# Altium PCB Raptor_V1.1.PcbDoc
Units mil, origin at the board's own origin, x right, y up, seen from the top; angles counter-clockwise.
Board outline 2857 x 2362 mil, 2 copper layers (Top Layer, Bottom Layer); 77 components, 48 nets, 231 pads, 329 vias.
Unrouted connection lines stored in the file: 3.
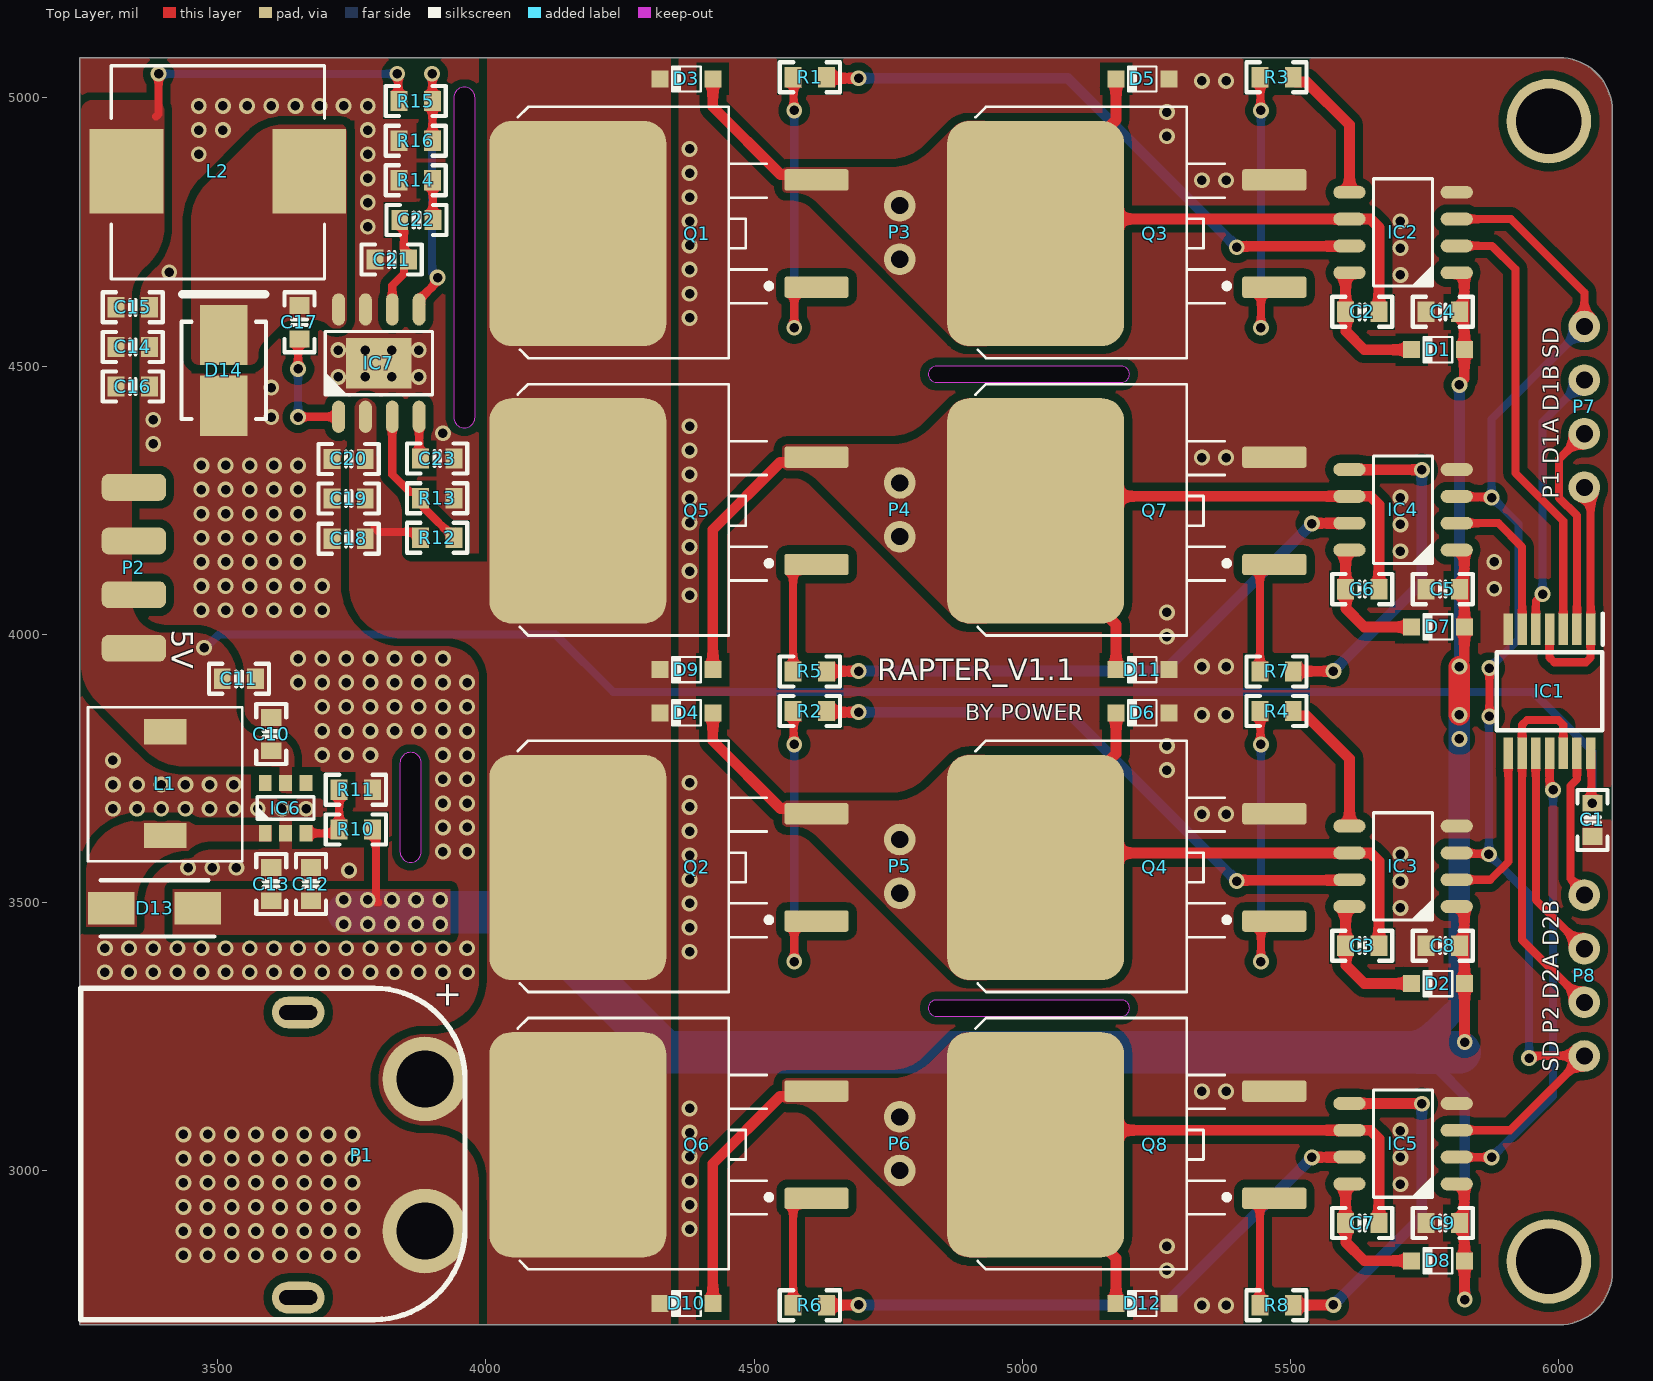
[diagram p0: Top Layer view]
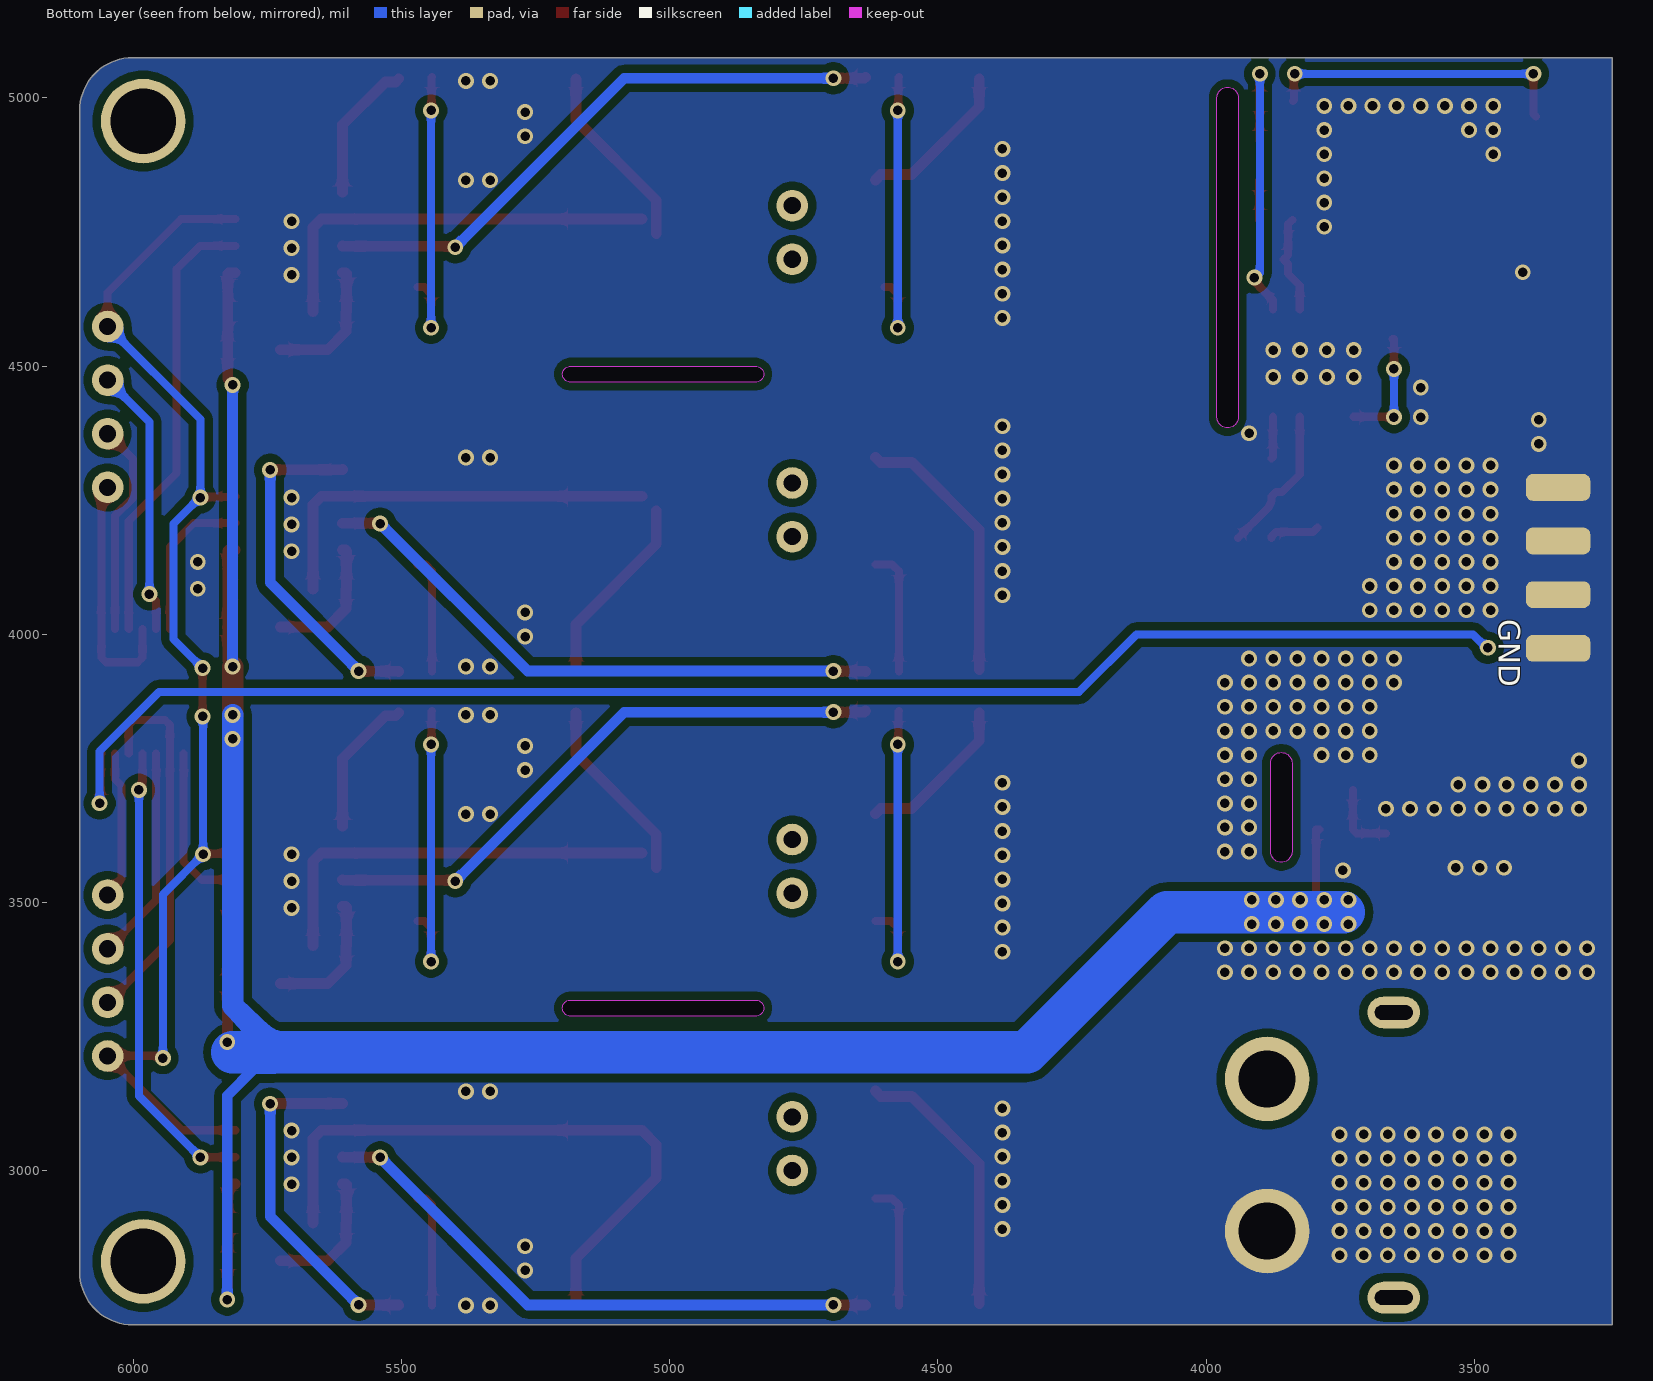
[diagram p1: Bottom Layer view, seen from below]
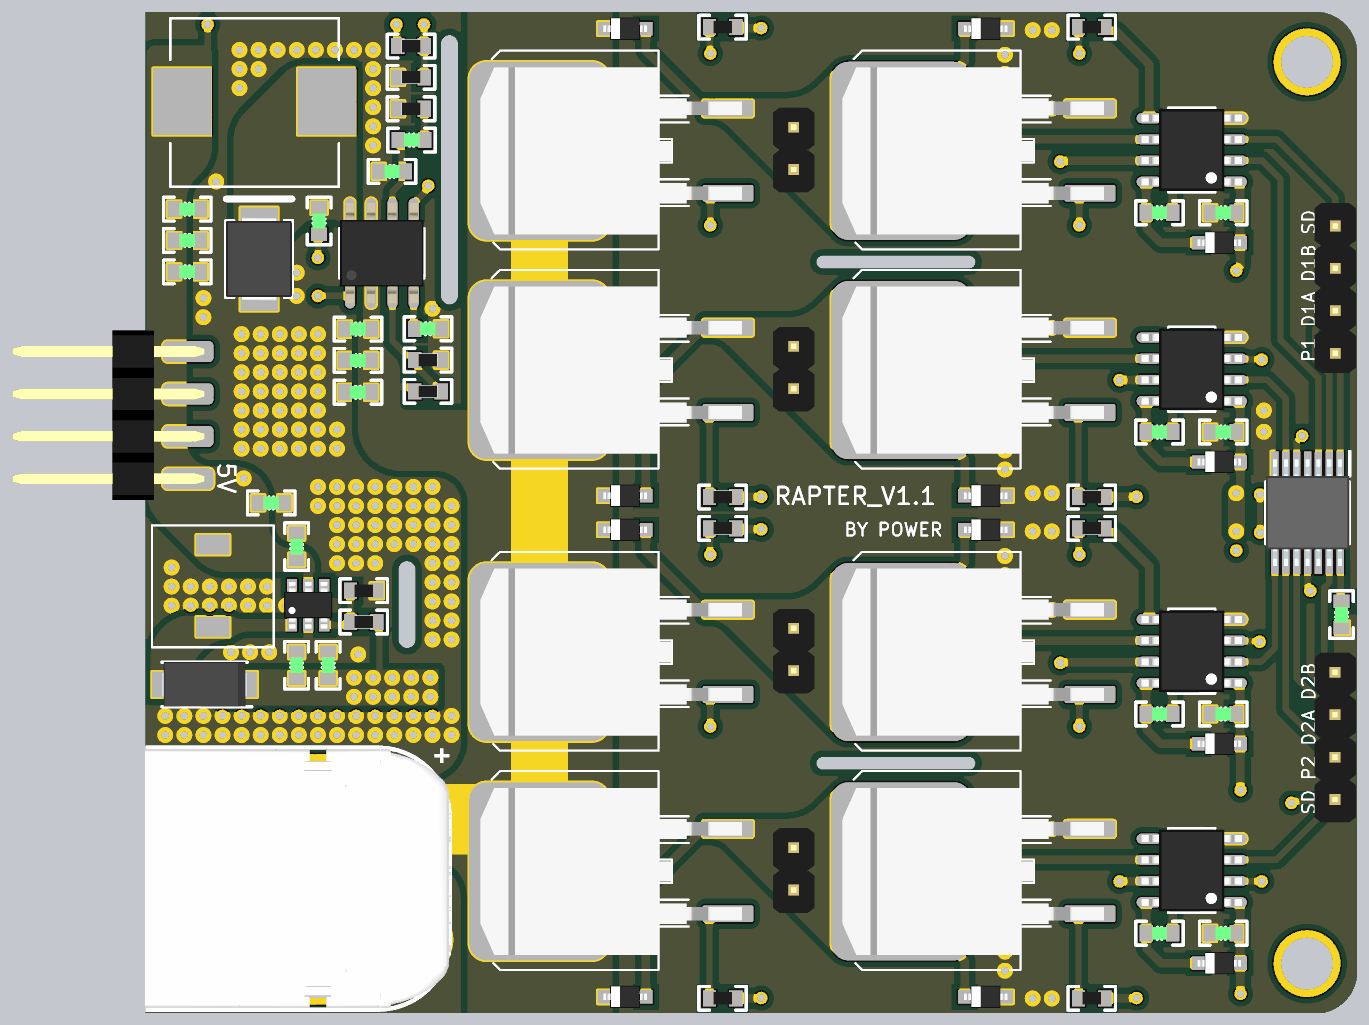
[diagram p2: 3D render of the assembled board from above, using the file's embedded part models]

## Layer stack, top to bottom
Top Solder: solder mask 0.4, Solder Resist, Dk 3.5
Top Layer: signal copper 1.4
Dielectric 1: dielectric 12.6, FR-4, Dk 4.8
Bottom Layer: signal copper 1.4
Bottom Solder: solder mask 0.4, Solder Resist, Dk 3.5

## Board outline
3243,2713 3243,5075 6001.57,5075 cw(c6001.57,4976.57) 6100,4976.57 6100,2811.43 cw(c6001.57,2811.43) 6001.57,2713
cut-out: 4840,3288.34 5185,3288.34 ccw(c5185,3303.34) 5200,3303.34 ccw(c5185,3303.34) 5185,3318.34 4840,3318.34 ccw(c4840,3303.34) 4825,3303.34 ccw(c4840,3303.34)
cut-out: 4840,4470 5185,4470 ccw(c5185,4485) 5200,4485 ccw(c5185,4485) 5185,4500 4840,4500 ccw(c4840,4485) 4825,4485 ccw(c4840,4485)
cut-out: 3840,3595 ccw(c3860,3595) 3860,3575 ccw(c3860,3595) 3880,3595 3880,3760 ccw(c3860,3760) 3860,3780 ccw(c3860,3760) 3840,3760
cut-out: 3940,4405 ccw(c3960,4405) 3960,4385 ccw(c3960,4405) 3980,4405 3980,5000 ccw(c3960,5000) 3960,5020 ccw(c3960,5000) 3940,5000

## Design rules (kind name [scope] priority, off if disabled: settings)
Clearance GND [InNamedPolygon('NONET_L01_P-001') Or InNamedPolygon('NONET_L01_P-001')] p1: gap=10 ignorepadtopadclearanceinfootprint=FALSE except(0: Arc-Hole Track-Hole SMDPad-Hole THPad-Hole Via-Hole Fill-Hole Poly-Hole Region-Hole Text-Hole; 15: Arc-Fill Arc-Poly Arc-Region Track-Fill Track-Poly Track-Region SMDPad-Fill SMDPad-Poly SMDPad-Region THPad-Fill THPad-Poly THPad-Region Via-Fill Via-Poly Via-Region Fill-Fill Fill-Poly Fill-Region Poly-Poly Poly-Region Region-Region)
Clearance 5V [InNamedPolygon('NONET_L01_P-001')] p2: gap=10 ignorepadtopadclearanceinfootprint=FALSE except(0: Arc-Hole Track-Hole SMDPad-Hole THPad-Hole Via-Hole Fill-Hole Poly-Hole Region-Hole Text-Hole)
Clearance Clearance_1 [InNamedPolygon('NONET_L01_P-001')] p3: gap=10 ignorepadtopadclearanceinfootprint=FALSE except(0: Arc-Hole Track-Hole SMDPad-Hole THPad-Hole Via-Hole Fill-Hole Poly-Hole Region-Hole Text-Hole; 15: Arc-Fill Arc-Poly Arc-Region Track-Fill Track-Poly Track-Region SMDPad-Fill SMDPad-Poly SMDPad-Region THPad-Fill THPad-Poly THPad-Region Via-Fill Via-Poly Via-Region Fill-Fill Fill-Poly Fill-Region Poly-Poly Poly-Region Region-Region)
Clearance [All] p4: gap=10 ignorepadtopadclearanceinfootprint=FALSE except(0: Arc-Hole Track-Hole SMDPad-Hole THPad-Hole Via-Hole Fill-Hole Poly-Hole Region-Hole Text-Hole; 15: Arc-Fill Arc-Poly Arc-Region Track-Fill Track-Poly Track-Region SMDPad-Fill SMDPad-Poly SMDPad-Region THPad-Fill THPad-Poly THPad-Region Via-Fill Via-Poly Via-Region Fill-Fill Fill-Poly Fill-Region Poly-Poly Poly-Region Region-Region)
PlaneConnect [All] p1: planeconnectstyle=Direct reliefexpansion=20 reliefentries=4 reliefconductorwidth=10 reliefairgap=10
PolygonConnect [All] p1: connectstyle=Direct reliefconductorwidth=10 reliefentries=4 polygonreliefangle="90 Angle" airgapwidth=10
RoutingVias [All] p1: holewidth=17.72 width=29.53 viastyle="Through Hole" minholewidth=17.72 minwidth=29.53 maxholewidth=17.72 maxwidth=29.53
SolderMaskExpansion [All] p1: expansion=4 istentingtop=FALSE
Width [All] p1: maxlimit=10000 minlimit=10 preferedwidth=15
29 further rules are at their usual default settings.

## Classes and differential pairs
component class H-bridge: C1 C2 C3 C4 C5 C6 C7 C8 C9 D1 D2 D3 D4 D5 D6 D7 D8 D9 D10 D11 D12 IC1 IC2 IC3 IC4 IC5 P1 P2 P3 P4 P5 P6 P7 P8 Q1 Q2 Q3 Q4 Q5 Q6 Q7 Q8 R1 R2 R3 R4 R5 R6 R7 R8
component class Buck-to-5V: C14 C15 C16 C17 C18 C19 C20 C21 C22 C23 D14 IC7 L2 R12 R13 R14 R15 R16
component class Boost-to-12V: C10 C11 C12 C13 D13 IC6 L1 R10 R11

## Components (designator, comment, footprint, x,y, rotation, side; value= is the part's Value field where it differs from the comment)
C1 "100nF" CAP-0603 6063,3654 r90 top
C2 "1uF/25V" CAP-0603 5633.95,4601.26 r0 top
C3 "1uF/25V" CAP-0603 5633.95,3419.6 r0 top
C4 "100nF" CAP-0603 5784.07,4601.26 r0 top
C5 "100nF" CAP-0603 5784.07,4084.32 r0 top
C6 "1uF/25V" CAP-0603 5633.95,4084.32 r0 top
C7 "1uF/25V" CAP-0603 5633.95,2902.65 r0 top
C8 "100nF" CAP-0603 5784.07,3419.6 r0 top
C9 "100nF" CAP-0603 5784.07,2902.65 r0 top
C10 "10uF/25V" CAP-0603 3599.89,3814.16 r270 top
C11 "10uF/25V" CAP-0603 3539.9,3917.15 r180 top
C12 "10uF/25V" CAP-0603 3674,3534.51 r270 top
C13 "10uF/25V" CAP-0603 3599.89,3534.51 r270 top
C14 "47uF" CAP-0603 3342,4535.87 r180 top
C15 "47uF" CAP-0603 3342,4609.75 r180 top
C16 "100nF" CAP-0603 3342,4461.98 r180 top
C17 "100nF" CAP-0603 3652.71,4581.75 r90 top
C18 "4.7uF" CAP-0603 3744.27,4178.12 r0 top
C19 "4.7uF" CAP-0603 3744.27,4253.12 r0 top
C20 "100nF" CAP-0603 3744.27,4327 r0 top
C21 "22pF" CAP-0603 3824.55,4698.64 r0 top
C22 "2200pF" CAP-0603 3870.66,4772.52 r180 top
C23 "10nF" CAP-0603 3909.27,4327.74 r180 top
D1 "SS14" SOD_323 5775.05,4530.75 r0 top
D2 "SS14" SOD_323 5775.05,3349.09 r0 top
D3 "SS14" SOD_323 4374.1,5035.35 r0 top locked
D4 "SS14" SOD_323 4374.1,3853.68 r0 top locked
D5 "SS14" SOD_323 5224.1,5035.35 r0 top locked
D6 "SS14" SOD_323 5224.1,3853.68 r0 top locked
D7 "SS14" SOD_323 5775.05,4013.81 r0 top
D8 "SS14" SOD_323 5775.05,2832.14 r0 top
D9 "SS14" SOD_323 4374.1,3934.32 r0 top locked
D10 "SS14" SOD_323 4374.1,2752.65 r0 top locked
D11 "SS14" SOD_323 5224.1,3934.32 r0 top locked
D12 "SS14" SOD_323 5224.1,2752.65 r0 top locked
D13 "SS34" DO-214AC/SMA 3382.71,3489.21 r180 top
D14 "SS54" DO-214AA/SMB 3511.35,4492.08 r270 top
IC1 "SN74HC08PW" TSSOP14 5983,3894 r270 top
IC2 "IR2104S" SOIC_8 5709.99,4749.21 r90 top
IC3 "IR2104S" SOIC_8 5709.99,3567.54 r90 top
IC4 "IR2104S" SOIC_8 5709.99,4232.26 r90 top
IC5 "IR2104S" SOIC_8 5709.99,3050.6 r90 top
IC6 "SX1308" SOT-23-6 3626.95,3676.21 r270 top
IC7 "TPS54531DDA" SOIC_8_PAD 3800.66,4505.69 r0 top
L1 "4.7uH/4A" SMD_7.3x7.3x4.2mm 3387.67,3739.18 r270 top
L2 "4.7uH 5A" L-10040 3500.66,4863.31 r180 top
P1 "XT30" XT60PW-M 3886.47,2887.7 r90 top locked
P2 "HDR2x4_2.54" HDR2X4_2.54_180H 3344,3974 r180 top
P3 "HDR1x2_2.54" HDR1X2_2.54_180 4771.57,4799.21 r0 top
P4 "HDR1x2_2.54" HDR1X2_2.54_180 4771.57,4282.26 r0 top
P5 "HDR1x2_2.54" HDR1X2_2.54_180 4771.57,3617.55 r0 top
P6 "HDR1x2_2.54" HDR1X2_2.54_180 4771.57,3100.6 r0 top
P7 "HDR1x4_2.54" HDR1x4_2.54_180 6048,4274 r180 top
P8 "HDR1x4_2.54" HDR1x4_2.54_180 6048,3514 r0 top
Q1 "IRF3205S" D2PAK-3 4394.1,4747.24 r0 top
Q2 "IRF3205S" D2PAK-3 4394.1,3565.58 r0 top
Q3 "IRF3205S" D2PAK-3 5247.54,4747.24 r0 top locked
Q4 "IRF3205S" D2PAK-3 5247.54,3565.58 r0 top locked
Q5 "IRF3205S" D2PAK-3 4394.1,4230.29 r0 top
Q6 "IRF3205S" D2PAK-3 4394.1,3048.63 r0 top
Q7 "IRF3205S" D2PAK-3 5247.54,4230.29 r0 top locked
Q8 "IRF3205S" D2PAK-3 5247.54,3048.63 r0 top locked
R1 "51R" R-0603 4604.1,5038.72 r180 top locked
R2 "51R" R-0603 4604.1,3857.06 r180 top locked
R3 "51R" R-0603 5474.1,5038.72 r180 top locked
R4 "51R" R-0603 5474.1,3857.06 r180 top locked
R5 "51R" R-0603 4604.1,3930.94 r180 top locked
R6 "51R" R-0603 4604.1,2749.28 r180 top locked
R7 "51R" R-0603 5474.1,3930.94 r180 top locked
R8 "51R" R-0603 5474.1,2749.28 r180 top locked
R10 "191k" R-0603 3757.77,3636.39 r0 top
R11 "10k" R-0603 3757.77,3710.27 r180 top
R12 "665k" R-0603 3909.27,4179.97 r180 top
R13 "130k" R-0603 3909.27,4253.86 r180 top
R14 "37.4k" R-0603 3869.55,4846.4 r0 top
R15 "10.2k" R-0603 3869.55,4994.17 r180 top
R16 "1.96k" R-0603 3869.55,4920.29 r0 top

## Footprints (in the part's own frame and the unit in brackets; to place one, negate y for a bottom-side part, rotate by r counter-clockwise, add the part's x,y. Pads: shape width x height; smd on the part's side, far side on the other; paste and mask are expansions set on the pad)
CAP-0603 [mm]
  rect 0.8x0.96 smd: 1(-0.79,0) 2(0.79,0)
  silkscreen extent -1.42,-0.71 1.42,0.71, body extent -0.76,-0.39 0.76,0.39, height 0.9
D2PAK-3 [mil] "D-PAK/TO-263-3; 3 Leads (1 Cropped); Body 14.7 (inc. leads) x 10.2 mm (LxW max)"
  round 20 on Mech15: 0(0,0)
  rrect25% 120x40 smd: 1(222.5,-100) 2(222.5,100)
  rrect25% 330x420 smd: 3(-222.5,0)
  silkscreen extent -335,-232 139,236, body extent -361,-197 256,197, height 189
DO-214AA/SMB [mm]
  rect 2.85x2.25 smd: 1(1.675,0) 2(-1.675,0)
  silkscreen extent -3.6,-2 2.3,2, body extent -2.5,-1.97 2.5,1.97, height 2.44
DO-214AC/SMA [mm]
  rect 2.2x1.55 smd: 1(2.05,0) 2(-2.05,0)
  silkscreen extent -2.83,-1.33 2.55,1.33, body extent -2.55,-1.33 2.55,1.33, height 2.29
HDR1X2_2.54_180 [mm]
  round 1.5 hole 0.813: 1(0,0) 2(0,-2.54)
  body extent -1.25,-3.81 1.25,1.27, height 8.2
HDR1x4_2.54_180 [mm]
  round 1.5 hole 0.813: 1(0,0) 2(0,-2.54) 3(0,-5.08) 4(0,-7.62)
  body extent -1.25,-8.89 1.25,1.27, height 8.2
HDR2X4_2.54_180H [mil]
  rrect50% 120x50 smd: 1(0,0) 3(0,-100) 5(0,-200) 7(0,-300)
  rrect50% 120x50 smd far side: 2(0,0) 4(0,-100) 6(0,-200) 8(0,-300)
  body extent -38,-350 415,50, height 78
L-10040 [mm] "10.1*11.6*4.0MM(长*宽*高)"
  rect 3.5x4 smd: 1(-4.326,0) 2(4.326,0)
  silkscreen extent -5.05,-5 5.05,5.1, body extent -5,-5 5,5.08, height 4
R-0603 [mm]
  rect 0.8x0.96 smd: 1(-0.79,0) 2(0.79,0)
  silkscreen extent -1.42,-0.71 1.42,0.71, body extent -0.76,-0.38 0.76,0.38, height 0.41
SMD_7.3x7.3x4.2mm [mm]
  rect 1.2x2 smd: 1(-2.02,0.37) 2(2.9,0.37)
  silkscreen extent -3.18,-3.28 4.12,4.02, body extent -3.18,-3.28 4.1,4, height 3
SOD_323 [mm]
  rect 0.8x0.8 smd: 1(1.25,0) 2(-1.25,0)
  silkscreen extent -0.72,-0.6 0.67,0.6, body extent -1.3,-0.68 1.3,0.68, height 1.1
SOIC_8 [mil]
  oval 24x60 smd: 1(-75,-100.02) 2(-25,-100.02) 3(25,-100.02) 4(75,-100.02) 5(75,99.98) 6(25,99.98) 7(-25,99.98) 8(-75,99.98)
  silkscreen extent -100,-55 100,55, body extent -96,-118 96,118, height 69
SOIC_8_PAD [mil]
  oval 24x60 smd: 1(-75,-100) 2(-25,-100) 3(25,-100) 4(75,-100) 5(75,100) 6(25,100) 7(-25,100) 8(-75,100)
  rect 122.05x94.49 smd: 9(0,0)
  silkscreen extent -100,-59 100,59, body extent -98,-118 98,118, height 71
SOT-23-6 [mil]
  rect 30x24 smd: 1(47,-38) 2(47,0) 3(47,38) 4(-47,38) 5(-47,0) 6(-47,-38)
  silkscreen extent -21,-53 21,53, body extent -55,-57 55,57, height 57
TSSOP14 [mm]
  rect 1.475x0.45 smd: 1(-2.938,1.95) 2(-2.938,1.3) 3(-2.938,0.65) 4(-2.938,0) 5(-2.938,-0.65) 6(-2.938,-1.3) 7(-2.938,-1.95) 8(2.938,-1.95) 9(2.938,-1.3) 10(2.938,-0.65) 11(2.938,0) 12(2.938,0.65) 13(2.938,1.3) 14(2.938,1.95)
  silkscreen extent -3.67,-2.5 1.85,2.52, body extent -3.2,-2.5 3.2,2.5, height 1.2
XT60PW-M [mm]
  oval 1.5x2.5 hole 0.7 slot 1.8 at 90 deg: 0(-3.15,6) 0(10.35,6)
  round 4 hole 2.7: 1(7.2,0) 2(0,0)
  silkscreen extent -4.2,-1.9 11.5,16.3, body extent -4.3,-1.95 11.6,16.35, height 8.45

## Part data
C1 C2 C3 C4 C5 C6 C7 C8 C9 C14 C15 C16 C17 C18 C19 C20 C21 C22 C23: library part CAP, "贴片电容", Package=0402, SuppliersPartNumber=C52923, ComponentLink1Description=供应商链接, ComponentLink1URL=http://www.szlcsc.com/product/details_53938.html, Supplier=LC
C10 C11 C12 C13: library part CAP, "X7R", Package=0402, SuppliersPartNumber=C52923, ComponentLink1Description=供应商链接, ComponentLink1URL=http://www.szlcsc.com/product/details_53938.html, Supplier=LC
D1 D2 D3 D4 D5 D6 D7 D8 D9 D10 D11 D12 D13: library part DIODE, "二极管", Package=SMA(DO-214AC), SuppliersPartNumber=C22452, ComponentLink1Description=供应商链接, ComponentLink1URL=http://www.szlcsc.com/product/details_23178.html, Supplier=LC
D14: library part DIODE, "肖特基二极管", Package=SMA(DO-214AC), SuppliersPartNumber=C22452, ComponentLink1Description=供应商链接, ComponentLink1URL=http://www.szlcsc.com/product/details_23178.html, Supplier=LC
IC1: "Integrated Circuit", Arrow Part Number=SN74HCT08PW, Manufacturer_Name="Texas Instruments", Mouser Part Number=595-SN74HCT08PW, Arrow Price/Stock=https://www.arrow.com/en/products/sn74hct08pw/texas-instruments, Datasheet Link=http://www.ti.com/lit/gpn/SN74HCT08, Height=1.2mm, Manufacturer_Part_Number=SN74HCT08PW, Mouser Price/Stock=https://www.mouser.co.uk/ProductDetail/Texas-Instruments/SN74HCT08PW?qs=7KMwW2o1%252BmRuz7pKtn1cmg%3D%3D
IC2 IC3 IC4 IC5: "Integrated Circuit", Manufacturer_Name=Infineon, Datasheet Link=http://www.infineon.com/dgdl/ir2104.pdf?fileId=5546d462533600a4015355c7c1c31671, Height=1.75mm, Manufacturer_Part_Number=IR2104S
IC6: "集成升压芯片", Manufacturer_Name="Shenzhen Suosemi Tech", Datasheet Link=https://datasheet.lcsc.com/szlcsc/Shenzhen-Suosemi-Tech-SX1308_C78162.pdf, Height=1.45mm, Manufacturer_Part_Number=SX1308
IC7: "集成稳压芯片", Manufacturer_Name="Texas Instruments", Mouser Part Number=595-TPS54531DDA, Arrow Part Number=TPS54531DDA, Arrow Price/Stock=https://www.arrow.com/en/products/tps54531dda/texas-instruments, Datasheet Link=http://www.ti.com/lit/gpn/tps54531, Height=1.7mm, Manufacturer_Part_Number=TPS54531DDA, Mouser Price/Stock=https://www.mouser.co.uk/ProductDetail/Texas-Instruments/TPS54531DDA?qs=jA5Ki6243omoJVKISZs%2FBg%3D%3D
L1 L2: library part INDUCTOR, "电感", Package=0402, SuppliersPartNumber=C32041, ComponentLink1Description=供应商链接, ComponentLink1URL=http://www.szlcsc.com/product/details_33003.html, Supplier=LC
P1: library part XT30/60, "XT30/60"
P2 P3 P4 P5 P6 P7 P8: "Header"
Q1 Q2 Q3 Q4 Q5 Q6 Q7 Q8: library part N-MOS, "N 沟道 MOS", Manufacturer_Name=Nexperia, Manufacturer_Part_Number=SI2302DS, Mouser Part Number=N/A, RS Part Number=7983053P, Datasheet Link=https://assets.nexperia.com/documents/data-sheet/SI2302DS.pdf, Height=1.1mm, Mouser Price/Stock=https://www.mouser.com/Search/Refine.aspx?Keyword=N%2FA, RS Price/Stock=http://uk.rs-online.com/web/p/products/7983053P
R1 R2 R3 R4 R5 R6 R7 R8 R10 R11 R12 R13 R14 R15 R16: library part RES, "贴片电阻", Package=0805, SuppliersPartNumber=C17798, Supplier=LC

## Free pads (board coordinates)
  round 157.48 hole 122.05: 3(5981.89,2831.11) 3(5981.89,4956.89)

## Via types
v1: diameter 29.53, hole 17.72, Top Layer to Bottom Layer, 329 vias

## Nets (pads, with @x,y where several pads share a name; then routed paths per layer and width w, separated by ;. In a path a pad name is that pad's centre, name@x,y a point inside that pad or via, vN(x,y) a via of type N, cw(c..) or ccw(c..) an arc to the next point about the centre after c; other vN are vias at no path point)
5V: C1.2 C10.2 C11.2 C14.2 C15.2 C16.2 IC1.14 IC6.5 L1.1 L2.2 P2.1 P2.3 P2.5 P2.7 R15.2 | length 3459.4
  Top Layer w15: 3385,4965 3390,4970 v1(3390,5045) ; v1(3835,5045) 3836.73,5043.27 3836.73,4995.9 R15.2 ; IC1.14 6061.13,3776.97 6061.13,3686.97 v1(6063,3685.1)
  Bottom Layer w15: v1(3390,5045) v1(3835,5045) ; v1(3475,3975) 3477.7,3975 3502.7,4000 4130,4000 4237.5,3892.5 5952.5,3892.5 6063,3782 v1(6063,3685.1)
12V: C4.2 C5.2 C8.2 C9.2 C12.2 C13.2 D1.1 D2.1 D7.1 D8.1 D13.2 IC2.1 IC3.1 IC4.1 IC5.1 R10.2 | length 5235.8
  Top Layer w15: R10.2 3795,3636.39 3795,3500 3800,3500
  Top Layer w20: IC5.1 5822.41,2975.6 5824.26,2973.75 D8.1@5824.26,2826.76 ; IC3.1 5822.41,3492.55 5824.26,3490.7 D2.1 5824.63,3348.72 5824.63,3240.37 v1(5825,3240) ; IC4.1 5822.41,4157.26 5824.26,4155.42 D7.1 ; IC2.1 5822.41,4674.21 5824.26,4672.36 5824.26,4476.84 5815,4467.58 v1(5815,4465) ; v1(5815,3940) 5815,3942.58 5824.26,3951.84 D7.1 ; D7.1@5824.63,4013.44 D7.1 ; v1(5825,2760) 5824.63,2760.37 5824.63,2831.04 D8.1@5825,2831.41
  Top Layer w40: v1(5815,3850) v1(5815,3940)
  Bottom Layer w20: 5706.06,3221 5717.06,3210 ; v1(5815,3940) v1(5815,4465) ; v1(5825,2760) 5825,3140 5775,3190 5737.06,3190 5717.06,3210 ; v1(5825,3240) 5822.42,3240 5803.42,3221 5792.42,3210 5717.06,3210
  Bottom Layer w40: 5717.06,3210 5728.06,3221 5815,3307.94 v1(5815,3805) v1(5815,3850)
  Bottom Layer w80: 3744,3482 4073.44,3482 4334.44,3221 5706.06,3221 5728.06,3221 5803.42,3221 5815,3221
  other v1: 3735,3460 3780,3460 3825,3460 3870,3460 3915,3460 3735,3505 3780,3505 3825,3505 3870,3505 3915,3505
DIR1A: IC1.2 P7.2 | length 397.6
  Top Layer w15: IC1.2 6034.18,4221.31 6000.97,4254.52 6000.97,4326.97 P7.2
DIR1B: IC1.5 P7.3 | length 501.9
  Top Layer w15: IC1.5 5957.41,4062.41 v1(5970,4075)
  Bottom Layer w15: v1(5970,4075) 5970,4396 P7.3
DIR2A: IC1.10 P8.2 | length 401.9
  Top Layer w15: IC1.10 5957.41,3504.59 P8.2
DIR2B: IC1.13 P8.1 | length 280.2
  Top Layer w15: IC1.13 6034.18,3730 6021.94,3717.76 6021.94,3544.81 6048,3518.75 P8.1
GND: C1.1 C4.1 C5.1 C8.1 C9.1 C10.1 C11.1 C12.1 C13.1 C14.1 C15.1 C16.1 C18.1 C19.1 C20.1 C21.1 C23.1 D5.1 D6.1 D11.1 D12.1 D14.1 IC1.7 IC2.4 IC3.4 IC4.4 IC5.4 IC6.2 IC7.7 IC7.9 P1.2 P2.2 P2.4 P2.6 P2.8 Q3.2 Q4.2 Q7.2 Q8.2 R11.1 R13.1 R14.1 R16.1
  other v1: 5335,2748.97 5380,2748.97 5269.63,2814.34 3436.47,2842.7 3481.47,2842.7 3526.47,2842.7 3571.47,2842.7 3616.47,2842.7 3661.47,2842.7 3706.47,2842.7 3751.47,2842.7 5269.63,2859.34 3436.47,2887.7 3481.47,2887.7 3526.47,2887.7 3571.47,2887.7 3616.47,2887.7 3661.47,2887.7 3706.47,2887.7 3751.47,2887.7 4380,2891.39 3436.47,2932.7 3481.47,2932.7 3526.47,2932.7 3571.47,2932.7 3616.47,2932.7 3661.47,2932.7 3706.47,2932.7 3751.47,2932.7 4380,2936.39 5705,2975 3436.47,2977.7 3481.47,2977.7 3526.47,2977.7 3571.47,2977.7 3616.47,2977.7 3661.47,2977.7 3706.47,2977.7 3751.47,2977.7 4380,2981.39 3436.47,3022.7 3481.47,3022.7 3526.47,3022.7 3571.47,3022.7 3616.47,3022.7 3661.47,3022.7 3706.47,3022.7 3751.47,3022.7 5705,3025 4380,3026.39 3436.47,3067.7 3481.47,3067.7 3526.47,3067.7 3571.47,3067.7 3616.47,3067.7 3661.47,3067.7 3706.47,3067.7 3751.47,3067.7 4380,3071.39 5705,3075 4380,3116.39 5335,3148.05 5380,3148.05 3290,3370 3335,3370 3380,3370 3425,3370 3470,3370 3515,3370 3560,3370 3605,3370 3650,3370 3695,3370 3740,3370 3785,3370 3830,3370 3875,3370 3920,3370 3965,3370 4380,3408.34 3290,3415 3335,3415 3380,3415 3425,3415 3470,3415 3515,3415 3560,3415 3605,3415 3650,3415 3695,3415 3740,3415 3785,3415 3830,3415 3875,3415 3920,3415 3965,3415 4380,3453.34 5705,3490 4380,3498.34 5705,3540 4380,3543.34 3745,3560 3445,3565 3490,3565 3535,3565 4380,3588.34 5705,3590 3920,3595 3965,3595 4380,3633.34 3920,3640 3965,3640 5335,3665 5380,3665 3305,3675 3350,3675 3395,3675 3440,3675 3485,3675 3530,3675 3575,3675 3620,3675 3665,3675 4380,3678.34 3920,3685 3965,3685 3305,3720 3350,3720 3395,3720 3440,3720 3485,3720 3530,3720 4380,3723.34 3920,3730 3965,3730 5269.63,3747 3305,3765 3695,3775 3740,3775 3785,3775 3920,3775 3965,3775 5269.63,3792 3695,3820 3740,3820 3785,3820 3830,3820 3875,3820 3920,3820 3965,3820 5335,3850 5380,3850 3695,3865 3740,3865 3785,3865 3830,3865 3875,3865 3920,3865 3965,3865 3650,3910 3695,3910 3740,3910 3785,3910 3830,3910 3875,3910 3920,3910 3965,3910 5335,3940 5380,3940 3650,3955 3695,3955 3740,3955 3785,3955 3830,3955 3875,3955 3920,3955 5269.63,3996 5269.63,4041 3470,4045 3515,4045 3560,4045 3605,4045 3650,4045 3695,4045 4380,4073.05 5880,4085 3470,4090 3515,4090 3560,4090 3605,4090 3650,4090 3695,4090 4380,4118.05 3470,4135 3515,4135 3560,4135 3605,4135 3650,4135 5880,4135 5705,4155 4380,4163.05 3470,4180 3515,4180 3560,4180 3605,4180 3650,4180 5705,4205 4380,4208.05 3470,4225 3515,4225 3560,4225 3605,4225 3650,4225 4380,4253.05 5705,4255 3470,4270 3515,4270 3560,4270 3605,4270 3650,4270 4380,4298.05 3470,4315 3515,4315 3560,4315 3605,4315 3650,4315 5335,4329.72 5380,4329.72 4380,4343.05 3380,4355 3920,4375 4380,4388.05 3380,4400 3600,4405 3600,4460 3725,4480 3775,4480 3825,4480 3875,4480 3725,4530 3775,4530 3825,4530 3875,4530 4380,4590 4380,4635 5705,4670 3410,4675 4380,4680 5705,4720 4380,4725 3780,4760 4380,4770 5705,4770 3780,4805 4380,4815 5335,4846.66 5380,4846.66 3780,4850 4380,4860 3465,4895 3780,4895 4380,4905 5269.63,4928.66 3465,4940 3510,4940 3780,4940 5269.63,4973.66 3465,4985 3510,4985 3555,4985 3600,4985 3645,4985 3690,4985 3735,4985 3780,4985 5335,5031.66 5380,5031.66
M1A: C2.2 D3.1 D5.2 IC2.6 P3.1 P3.2 Q1.2 Q3.3 | length 1428.7
  Top Layer w20: D3.1 4423.31,4983.35 4549.42,4857.24 4606.6,4857.24 Q1.2 ; Q3.3 5025.04,4809.15 5174.89,4959 D5.2 ; Q3.3@5052.01,4774.21 IC2.6 5649.4,4774.21 5665.05,4758.56 C2.2
M1B: C6.2 D9.1 D11.2 IC4.6 P4.1 P4.2 Q5.2 Q7.3 | length 1644.9
  Top Layer w20: D9.1 4423.31,4194.98 4548.63,4320.29 4606.6,4320.29 Q5.2 ; Q7.3 5025.04,4168.38 5174.89,4018.53 D11.2 ; Q7.3@5052.01,4257.26 IC4.6 5649.4,4257.26 5665.05,4241.61 C6.2
M2A: C3.2 D4.1 D6.2 IC3.6 P5.1 P5.2 Q2.2 Q4.3 | length 1428.7
  Top Layer w20: D4.1 4423.31,3801.69 4549.42,3675.58 4606.6,3675.58 Q2.2 ; Q4.3 5025.04,3627.49 5174.89,3777.34 D6.2 ; Q4.3@5052.01,3592.55 IC3.6 5649.4,3592.55 5665.05,3576.9 C3.2
M2B: C7.2 D10.1 D12.2 IC5.6 P6.1 P6.2 Q6.2 Q8.3 | length 1683
  Top Layer w20: D10.1 4423.31,3013.31 4548.63,3138.63 4606.6,3138.63 Q6.2 ; D12.2 5174.89,2836.87 5025.04,2986.72 Q8.3 5052.01,3075.6 IC5.6 5649.4,3075.6 5665.05,3059.95 C7.2
NetC2_1: C2.1 D1.2 IC2.8 | length 252
  Top Layer w20: IC2.8 5604.69,4674.21 5602.84,4672.36 C2.1 5603.63,4600.48 5603.63,4564.98 5637.86,4530.75 D1.2
NetC3_1: C3.1 D2.2 IC3.8 | length 252
  Top Layer w20: IC3.8 5604.69,3492.55 5602.84,3490.7 C3.1 5603.63,3418.81 5603.63,3383.32 5637.86,3349.09 D2.2
NetC6_1: C6.1 D7.2 IC4.8 | length 252
  Top Layer w20: IC4.8 5604.69,4157.26 5602.84,4155.42 C6.1 5603.63,4083.53 5603.63,4048.03 5637.86,4013.81 D7.2
NetC7_1: C7.1 D8.2 IC5.8 | length 252
  Top Layer w20: IC5.8 5604.69,2975.6 5602.84,2973.75 C7.1 5603.63,2901.87 5603.63,2866.37 5637.86,2832.14 D8.2
NetC17_1: C17.1 IC7.1 | length 224.7
  Top Layer w15: v1(3650,4405) 3650,4405.69 IC7.1 ; v1(3650,4495) 3650,4550.65 C17.1
  Bottom Layer w15: v1(3650,4405) v1(3650,4495)
NetC17_2: C17.2 D14.2 IC7.8 L2.1
NetC21_2: C21.2 C22.2 IC7.6 | length 185.9
  Top Layer w15: IC7.6 3825.66,4650.66 3847.41,4672.41 3847.41,4690.39 C21.2 3847.41,4706.88 3847.41,4764.66 C22.2
NetC22_1: C22.1 R14.2 | length 74.3
  Top Layer w15: R14.2 3901.21,4845.85 3901.21,4773.07 C22.1
NetC23_2: C23.2 IC7.4 | length 79
  Top Layer w15: IC7.4 3875.66,4330.25 C23.2
NetD13_1: D13.1 IC6.1 L1.2
NetIC2_5: IC2.5 R3.1 | length 266
  Top Layer w20: R3.1@5505.2,5035.57 5510.95,5029.82 5530.18,5029.82 5610.01,4949.99 IC2.5
NetIC2_7: IC2.7 R1.1 | length 1107.2
  Top Layer w20: R1.1 4637.26,5036.66 v1(4695,5036.66) ; v1(5400,4721.66) 5401.78,4723.44 5609.24,4723.44 IC2.7
  Bottom Layer w20: v1(4695,5036.66) 5085,5036.66 v1(5400,4721.66)
NetIC3_5: IC3.5 R4.1 | length 266
  Top Layer w20: R4.1@5505.2,3853.91 5510.95,3848.16 5530.18,3848.16 5610.01,3768.33 IC3.5
NetIC3_7: IC3.7 R2.1 | length 1107.2
  Top Layer w20: R2.1 4637.26,3855 v1(4695,3855) ; v1(5400,3540) 5401.78,3541.78 5609.24,3541.78 IC3.7
  Bottom Layer w20: v1(4695,3855) 5085,3855 v1(5400,3540)
NetIC4_5: IC4.5 R7.1 | length 653.7
  Top Layer w20: R7.1 5505.56,3931.3 5579.64,3931.3 v1(5580,3931.66) ; IC4.5 5610.31,4306.96 5744.7,4306.96 v1(5745,4306.66)
  Bottom Layer w20: v1(5580,3931.66) 5745,4096.66 v1(5745,4306.66)
NetIC4_7: IC4.7 R5.1 | length 1089.3
  Top Layer w20: R5.1 4635.56,3931.3 4694.64,3931.3 v1(4695,3931.66) ; v1(5540,4206.66) 5540.3,4206.96 5609.71,4206.96 IC4.7
  Bottom Layer w20: v1(4695,3931.66) 5265,3931.66 v1(5540,4206.66)
NetIC5_5: IC5.5 R8.1 | length 653.7
  Top Layer w20: R8.1 5505.56,2749.64 5579.64,2749.64 v1(5580,2750) ; IC5.5 5610.31,3125.3 5744.7,3125.3 v1(5745,3125)
  Bottom Layer w20: v1(5580,2750) 5745,2915 v1(5745,3125)
NetIC5_7: IC5.7 R6.1 | length 1089.3
  Top Layer w20: R6.1 4635.56,2749.64 4694.64,2749.64 v1(4695,2750) ; v1(5540,3025) 5540.3,3025.3 5609.71,3025.3 IC5.7
  Bottom Layer w20: v1(4695,2750) 5265,2750 v1(5540,3025)
NetIC6_3: IC6.3 R10.1 R11.2 | length 138.6
  Top Layer w15: IC6.3 3719.49,3629.21 R10.1 R11.2
NetIC7_3: IC7.3 R12.1 R13.2 | length 278.6
  Top Layer w15: IC7.3 3825.66,4298.35 3858.74,4265.26 3869.92,4265.26 3878.17,4257.01 R13.2 ccw(c3906.36,4253.86) 3886.43,4233.92 R12.1
NetIC7_5: IC7.5 R15.1 R16.2 | length 583.4
  Top Layer w15: IC7.5 3875.66,4623.69 3907.22,4655.25 3907.22,4662.22 v1(3910,4665) ; v1(3900,5045) 3900.33,5044.67 3900.33,4994.5 R15.1 R16.2
  Bottom Layer w15: v1(3900,5045) 3900,4673.79 3908.79,4665 v1(3910,4665)
NetQ1_1: Q1.1 R1.2 | length 561.2
  Top Layer w15: R1.2 4574,5037.72 4574,4977.66 v1(4575,4976.66) ; v1(4575,4571.66) 4575,4634.74 4587.5,4647.24 Q1.1@4600.04,4647.24
  Bottom Layer w15: v1(4575,4571.66) v1(4575,4976.66)
NetQ2_1: Q2.1 R2.2 | length 577.7
  Top Layer w15: R2.2 4574,3856.06 4574,3796 v1(4575,3795) ; v1(4575,3390) 4575,3453.08 4587.5,3465.58 Q2.1
  Bottom Layer w15: v1(4575,3390) v1(4575,3795)
NetQ3_1: Q3.1 R3.2 | length 561.2
  Top Layer w15: R3.2 5444,5037.72 5444,4977.66 v1(5445,4976.66) ; v1(5445,4571.66) 5445,4634.74 5457.5,4647.24 Q3.1
  Bottom Layer w15: v1(5445,4571.66) v1(5445,4976.66)
NetQ4_1: Q4.1 R4.2 | length 561.2
  Top Layer w15: R4.2 5444,3856.06 5444,3796 v1(5445,3795) ; v1(5445,3390) 5445,3453.08 5457.5,3465.58 Q4.1
  Bottom Layer w15: v1(5445,3390) v1(5445,3795)
NetQ5_1: Q5.1 R5.2 | length 235.6
  Top Layer w15: R5.2 4573,4117.79 4585.5,4130.29 Q5.1
NetQ6_1: Q6.1 R6.2 | length 235.6
  Top Layer w15: R6.2 4573,2936.13 4585.5,2948.63 Q6.1
NetQ7_1: Q7.1 R7.2 | length 219.1
  Top Layer w15: R7.2 5443,4117.79 5455.5,4130.29 Q7.1
NetQ8_1: Q8.1 R8.2 | length 219.1
  Top Layer w15: R8.2 5443,2936.13 5455.5,2948.63 Q8.1
PWM1: IC1.1 IC1.4 P7.1 | length 459
  Top Layer w15: IC1.4 5983,3956.79 5991.79,3948 6050.98,3948 6059.77,3956.79 IC1.1 6059.77,4250.31 6048,4262.08 P7.1
PWM1A: IC1.3 IC2.2 | length 835.3
  Top Layer w15: IC2.2 5875.79,4724.21 5919.16,4680.84 5919.16,4300.98 6008.59,4211.55 IC1.3
PWM1B: IC1.6 IC4.2 | length 293.6
  Top Layer w15: IC4.2 5887.74,4207.26 5931.82,4163.18 IC1.6
PWM2: IC1.9 IC1.12 P8.3 | length 702.3
  Top Layer w15: IC1.12 6008.59,3831.21 5999.8,3840 5940.61,3840 5931.82,3831.21 IC1.9 5931.82,3430.18 P8.3
PWM2A: IC1.8 IC3.2 | length 312.3
  Top Layer w15: IC3.2 5872.55,3542.55 5906.23,3576.23 IC1.8
PWM2B: IC1.11 IC5.2 | length 868.8
  Top Layer w15: IC5.2 5810.31,3025.3 5874.7,3025.3 v1(5875,3025) ; IC1.11 5983,3720.6 5989.67,3713.93 v1(5989.67,3710)
  Bottom Layer w15: v1(5875,3025) 5989.67,3139.67 v1(5989.67,3710)
SD: IC2.3 IC3.3 IC4.3 IC5.3 P7.4 P8.4 | length 2398.3
  Top Layer w15: IC5.3 5909.6,3075.6 P8.4 6047.5,3214.5 5953.43,3214.5 5948.93,3210 v1(5945,3210) ; IC3.3 5811.28,3591.27 5868.73,3591.27 v1(5870,3590) ; IC4.3 5811.14,4256.13 5873.87,4256.13 v1(5875,4255) ; IC2.3 5910.79,4774.21 6048,4637 P7.4 ; v1(5871,3847) v1(5871,3937)
  Bottom Layer w15: v1(5871,3847) cw(c5871,3848) 5870,3848 v1(5870,3590) 5945,3515 v1(5945,3210) ; v1(5871,3937) 5925,3991 5925,4206.21 5876.21,4255 v1(5875,4255) 5875,4401 P7.4
VM: C18.2 C19.2 C20.2 D3.2 D4.2 D9.2 D10.2 IC7.2 P1.1 Q1.3 Q2.3 Q5.3 Q6.3 R12.2 | length 95.1
  Top Layer w15: 3792.62,4199.03 3800.65,4191 3869.92,4191 3878.17,4182.75 R12.2
pads on no net: IC6.4 IC6.6 P1.0 Q1.0 Q2.0 Q3.0 Q4.0 Q5.0 Q6.0 Q7.0 Q8.0

## Polygon pours and split planes (outlines as drawn)
M2A on Top Layer "NONET_L01_P-001" (solid, pour order 7): 4574.44,3641.58 cw(c4574.44,3583.01) 4615.86,3624.43 4876.27,3364.01 ccw(c4901.33,3396.88) 4901.33,3355.55 4934,3355.55 4934,3775.45 4901,3775.45 ccw(c4901,3734.45) 4872.01,3763.44 4827.31,3718.74 cw(c4756.6,3789.45) 4756.6,3689.45 4561.5,3689.45 ccw(c4561.5,3680.45) 4552.5,3680.45 4552.5,3650.76 ccw(c4561.67,3650.76) 4561.67,3641.58 4565.5,3641.58
GND on Top Layer "NONET_L01_P-001" (solid, pour order 19): 3243,5075 3243,2713 6000,2713 ccw(c6000,2813) 6100,2813 6100,4975 ccw(c6000,4975) 6000,5075
VM on Top Layer "Top Layer-VM" (solid, pour order 17): 3800,3170 ccw(c3885,3170) 3885,3085 3902,3085 cw(c3902,2985) 4002,2985 4002.62,2906 4002.62,2712.97 4344.5,2712.97 4344.5,5075 4002.62,5075 4002.62,4135.69 3861,4135.69 cw(c3861.16,4153.84) 3843,4153.84 cw(c3861.16,4153.84) 3843,4154 3843,4220.92 3843,4225.54 ccw(c3781.55,4225.55) 3825,4269 cw(c3895.01,4339.01) 3796,4339.01 3796,4419 ccw(c3775,4419) 3775,4440 ccw(c3775,4421) 3756,4421 3756,4347.08 cw(c3748.8,4347.08) 3753.89,4341.98 3752.91,4341.09 ccw(c3772,4322) 3745,4322 3745,4093 ccw(c3845,4093) 3845,3993 3927,3993 cw(c3927,3917) 4002.62,3924.6 4002.62,3355 cw(c3902.62,3355) 3902.62,3255 3885,3255 ccw(c3885,3170)
5V on Top Layer "Top Layer-5V" (solid, pour order 16): 3360.65,4680.31 ccw(c3410.52,4630.45) 3340,4630.45 3340,4062.83 ccw(c3399.83,4062.83) 3399.83,4003 3454,4003 cw(c3454,3922) 3535,3922 3535,3862 ccw(c3587.29,3862) 3587.29,3809.71 cw(c3598,3766.02) 3598,3811 cw(c3598,3766) 3643,3766 3643,3704 3626.05,3704 3615,3704 3615,3737 ccw(c3598,3737) 3598,3754 3437.42,3754 cw(c3437.42,3854) 3366.71,3783.29 3309.29,3840.71 3274.94,3875.06 cw(c3345.65,3945.77) 3245.65,3945.77 3245.65,4975.31 cw(c3265.65,4975.31) 3265.65,4995.31 3380.65,4995.31 cw(c3380.65,4975.31) 3400.65,4975.31 3400.65,4761.73 cw(c3300.66,4761.73) 3371.37,4691.02
NetC17_2 on Top Layer "NONET_L01_P-001" (solid, pour order 13): 3450.66,4517.38 ccw(c3465.66,4517.38) 3465.66,4502.38 3559.98,4502.38 ccw(c3559.98,4517.95) 3575.54,4517.95 ccw(c3551.71,4520.31) 3575.66,4520.31 cw(c3611.86,4520.32) 3586.26,4545.92 3615.05,4574.71 cw(c3640.65,4549.11) 3640.66,4585.31 3684.11,4585.31 cw(c3684.11,4553.37) 3706.7,4575.95 ccw(c3720.32,4589.58) 3720.32,4570.31 3723.88,4570.31 ccw(c3723.88,4586.42) 3735.27,4575.03 ccw(c3722.29,4588.02) 3740.66,4588.02 3740.65,4935.64 ccw(c3721.75,4935.65) 3735.12,4949.01 ccw(c3728.59,4933.26) 3728.58,4950.31 3620.65,4950.31 ccw(c3620.65,4875.72) 3567.91,4928.46 3479.94,4840.5 ccw(c3550.65,4769.79) 3450.66,4769.79
12V on Top Layer "NONET_L01_P-001" (solid, pour order 11): 3416,3525 3934,3525 3934,3440 3416,3440
NetD13_1 on Top Layer "NONET_L01_P-001" (solid, pour order 10): 3601,3644 3601,3614.27 3576.67,3614.27 3486.04,3614 ccw(c3486.04,3555.96) 3445,3597 ccw(c3445,3501) 3349,3501 3349,3455 3255,3455 3255,3553 cw(c3355,3553) 3355,3653 3445,3653 ccw(c3466.73,3674.73) 3466.73,3644
M1B on Top Layer "NONET_L01_P-001" (solid, pour order 9): 4574.44,4306.3 cw(c4574.44,4247.73) 4615.86,4289.14 4876.27,4028.73 ccw(c4901.33,4061.6) 4901.33,4020.27 4934,4020.27 4934,4440.16 4901,4440.16 ccw(c4901,4399.16) 4872.01,4428.15 4827.31,4383.45 cw(c4756.6,4454.16) 4756.6,4354.16 4561.5,4354.16 ccw(c4561.5,4345.16) 4552.5,4345.16 4552.5,4315.47 ccw(c4561.67,4315.47) 4561.67,4306.3 4565.5,4306.3
M1A on Top Layer "NONET_L01_P-001" (solid, pour order 8): 4574.44,4823.25 cw(c4574.44,4764.67) 4615.86,4806.09 4876.27,4545.68 ccw(c4901.33,4578.54) 4901.33,4537.21 4934,4537.21 4934,4957.11 4901,4957.11 ccw(c4901,4916.11) 4872.01,4945.1 4827.31,4900.4 cw(c4756.6,4971.11) 4756.6,4871.11 4561.5,4871.11 ccw(c4561.5,4862.11) 4552.5,4862.11 4552.5,4832.42 ccw(c4561.67,4832.42) 4561.67,4823.25 4565.5,4823.25
M2B on Top Layer "NONET_L01_P-001" (solid, pour order 0): 4574.44,3124.64 cw(c4574.44,3066.06) 4615.86,3107.48 4876.27,2847.07 ccw(c4901.33,2879.93) 4901.33,2838.6 4934,2838.6 4934,3258.5 4901,3258.5 ccw(c4901,3217.5) 4872.01,3246.49 4827.31,3201.79 cw(c4756.6,3272.5) 4756.6,3172.5 4561.5,3172.5 ccw(c4561.5,3163.5) 4552.5,3163.5 4552.5,3133.81 ccw(c4561.67,3133.81) 4561.67,3124.64 4565.5,3124.64
VM on Top Solder "NONET_L01_P-001" (solid): 3884,3254 3884,3088.53 4240,3088.53 4240,4623 4105,4623 4105,3254
GND on Bottom Layer "NONET_L01_P-001" (solid, pour order 18): 3243,5075 3243,2713 6000,2713 ccw(c6000,2813) 6100,2813 6100,4975 ccw(c6000,4975) 6000,5075

## Silkscreen, mask and mechanical layers (free items; w line width, h text height)
Top Overlay:
  text "P1 D1A D1B SD" at 6000,4252.56 h30 r90
  text "5V" at 3415.01,4008.32 h40 r270
  text "RAPTER_V1.1" at 4730.06,3914.34 h40
  text "BY POWER" at 4894.04,3840 h30
  text "SD P2 D2A D2B" at 6000,3185.07 h30 r90
Bottom Overlay:
  text "GND" at 3454.99,4028.32 h40 r90
Mechanical 1:
  lines w10: 3243,2713 3243,5075 6001.57,5075 cw(c6001.57,4976.57) 6100,4976.57 6100,2811.43 cw(c6001.57,2811.43) 6001.57,2713 3243,2713 ; 3840,3595 ccw(c3860,3595) 3860,3575 ccw(c3860,3595) 3880,3595 3880,3760 ccw(c3860,3760) 3860,3780 ccw(c3860,3760) 3840,3760 3840,3595 ; 3940,4405 ccw(c3960,4405) 3960,4385 ccw(c3960,4405) 3980,4405 3980,5000 ccw(c3960,5000) 3960,5020 ccw(c3960,5000) 3940,5000 3940,4405 ; 4825,3303.34 ccw(c4840,3303.34) 4840,3288.34 5185,3288.34 ccw(c5185,3303.34) 5200,3303.34 ccw(c5185,3303.34) 5185,3318.34 4840,3318.34 ccw(c4840,3303.34) 4825,3303.34 ; 4825,4485 cw(c4840,4485) 4840,4500 5185,4500 cw(c5185,4485) 5200,4485 cw(c5185,4485) 5185,4470 4840,4470 cw(c4840,4485) 4825,4485

## Text inside footprints (layer, text, board x,y; h text height)
P1: Top Overlay "+" at 3965.21,3301.08 h78.74 r90